# Altium PCB LED_PCB.PcbDoc (part 1 of 3)
Units mil, origin at the board's own origin, x right, y up, seen from the top; angles counter-clockwise.
Board outline 8000 x 4000 mil, 2 copper layers (Top Layer, Bottom Layer); 186 components, 303 nets, 1412 pads, 346 vias.
Unrouted connection lines stored in the file: 5.
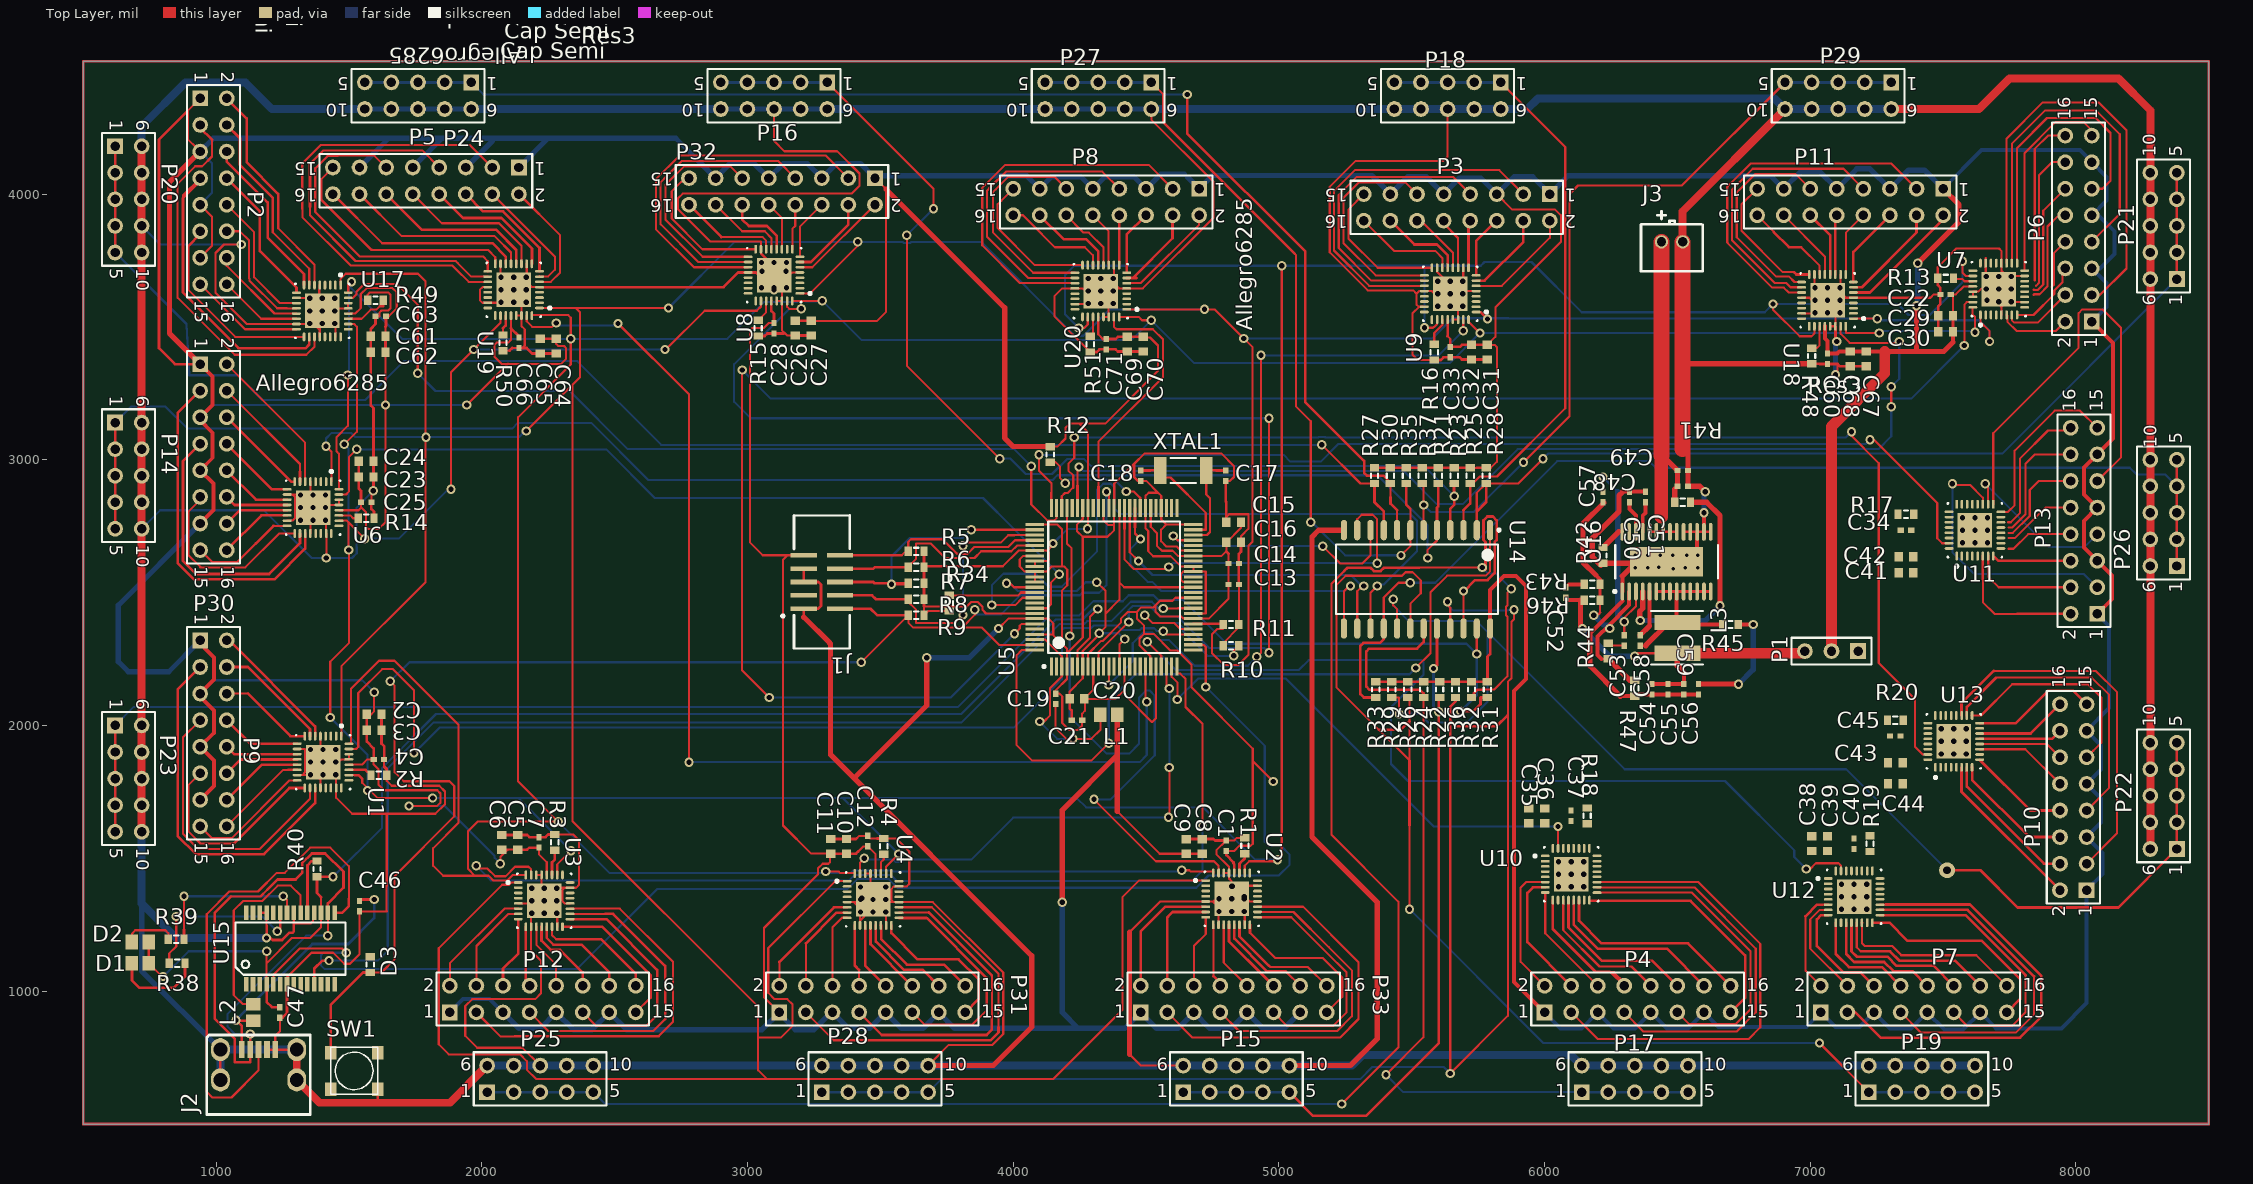
[diagram p0: Top Layer view]
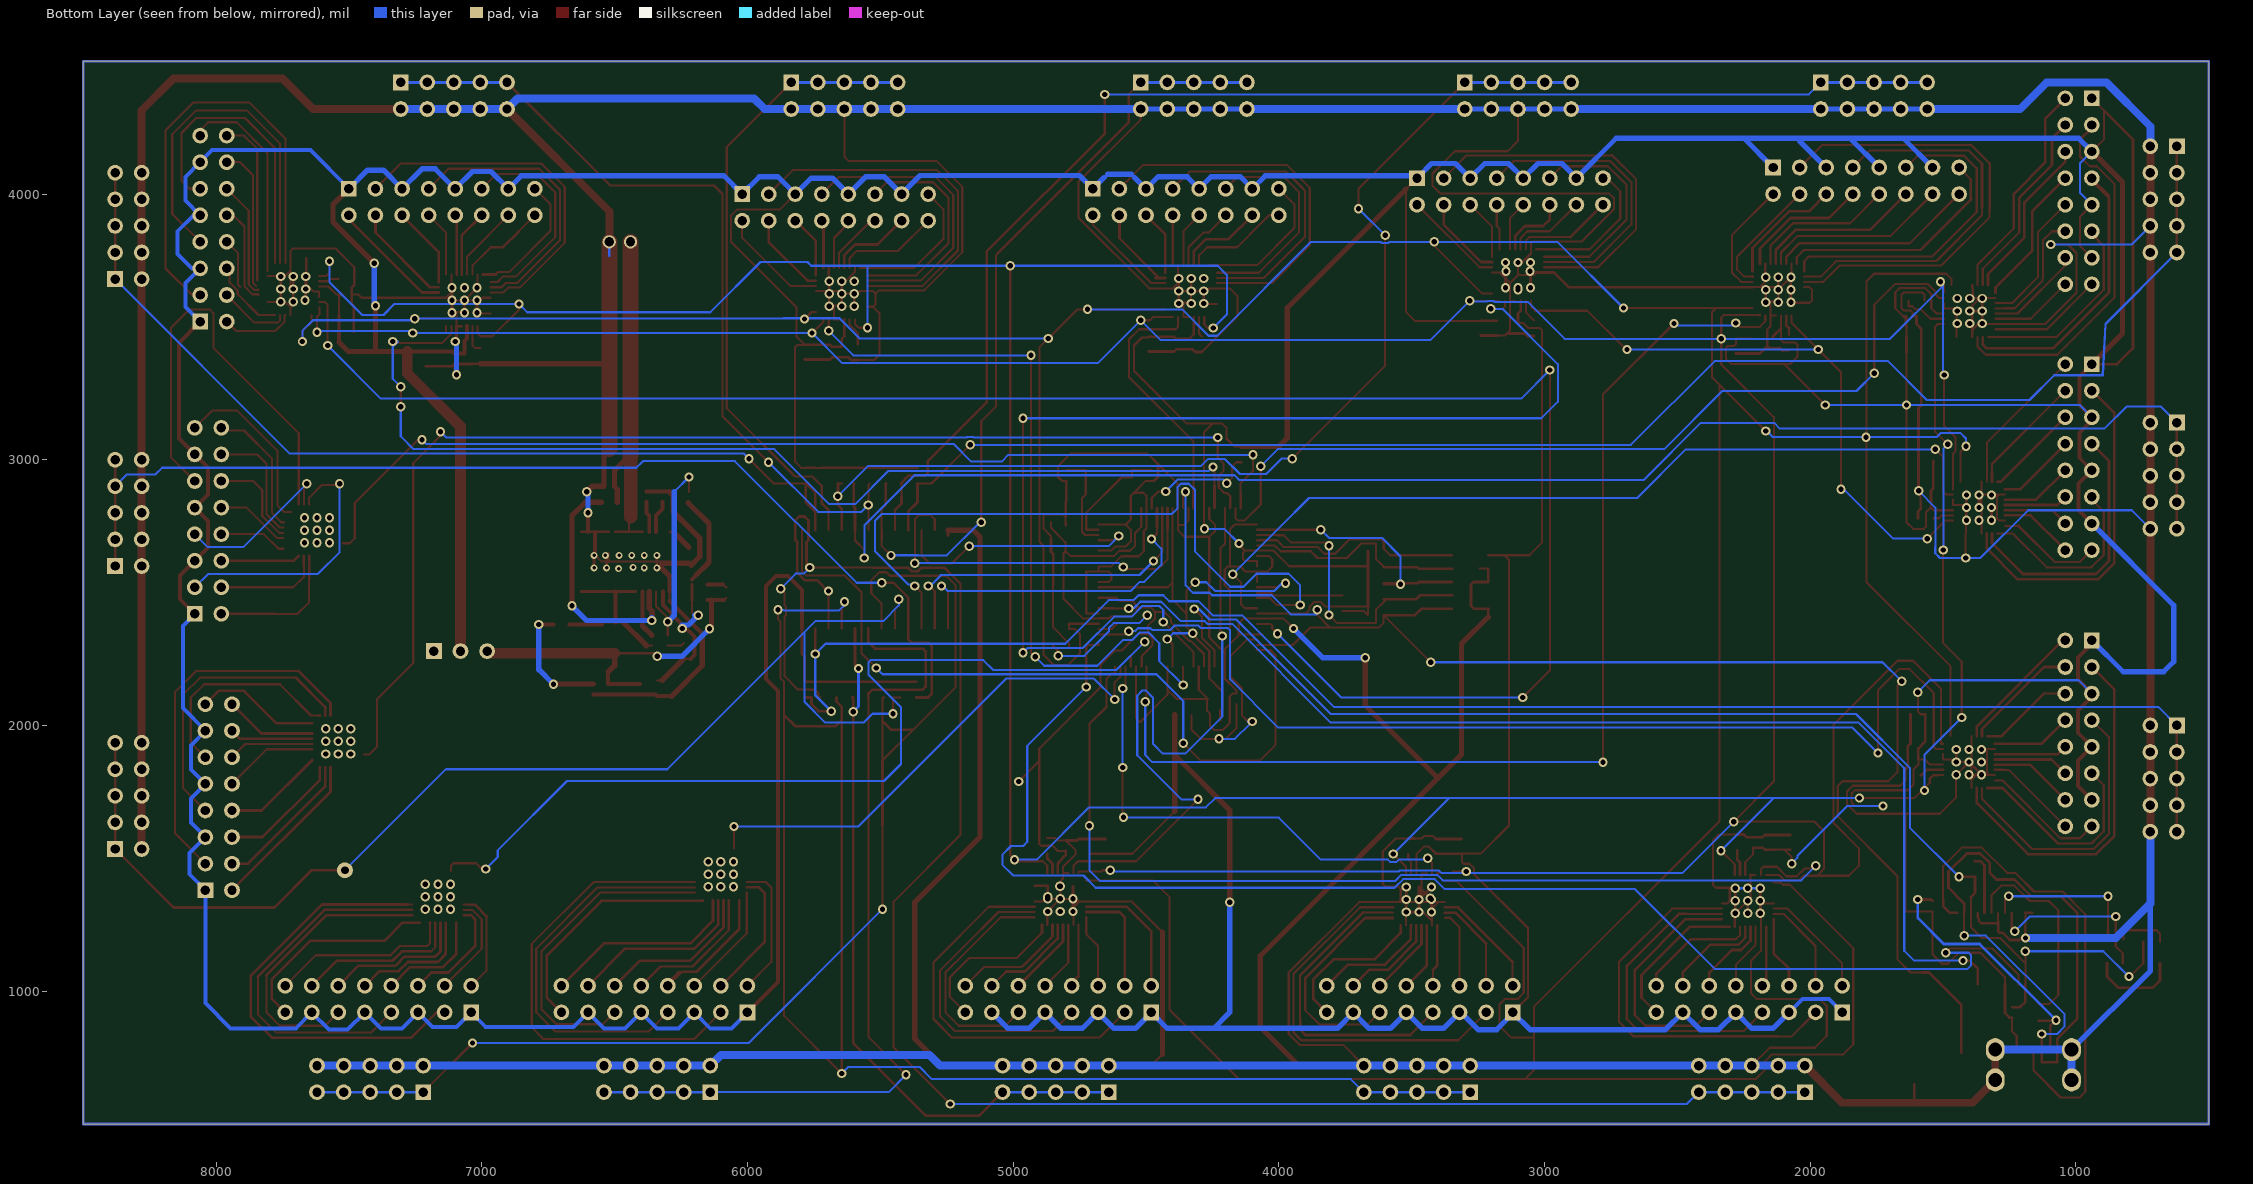
[diagram p1: Bottom Layer view, seen from below]

## Layer stack, top to bottom
Top Layer: signal copper 1.4
Dielectric: dielectric 12.6, FR-4, Dk 4.8
Bottom Layer: signal copper 1.4

## Board outline
500,500 500,4500 8500,4500 8500,500

## Design rules (kind name [scope] priority, off if disabled: settings)
Clearance [All] p1: gap=8
PolygonConnect [All] p1: connectstyle=Relief reliefconductorwidth=10 reliefentries=4 polygonreliefangle="90 Angle"
RoomDefinition NEWLED [InComponentClass('NEWLED')] p1: confinementstyle=ConfineIn formatcopy=TRUE lockcomponents=FALSE outline 8545,555 13415,555 13415,925 8545,925
RoomDefinition POWER [InComponentClass('POWER')] p2: confinementstyle=ConfineIn formatcopy=TRUE lockcomponents=FALSE outline 8710,870 13650,870 13650,1390 8710,1390
RoomDefinition USB [InComponentClass('USB')] p3: confinementstyle=ConfineIn formatcopy=TRUE lockcomponents=FALSE outline 7045,5780 9680,5780 9680,6295 7045,6295
RoomDefinition TILE_DEMUX [InComponentClass('TILE_DEMUX')] p4: confinementstyle=ConfineIn formatcopy=TRUE lockcomponents=FALSE outline 7045,4980 14775,4980 14775,5730 7045,5730
RoomDefinition REDLED [InComponentClass('REDLED')] p5: confinementstyle=ConfineIn formatcopy=TRUE lockcomponents=FALSE outline 7045,4560 11925,4560 11925,4930 7045,4930
RoomDefinition LED_HEADERS [InComponentClass('LED_HEADERS')] p6: confinementstyle=ConfineIn formatcopy=TRUE lockcomponents=FALSE outline 6405,6715 9465,6715 9465,8590 6405,8590
RoomDefinition GREENLED [InComponentClass('GREENLED')] p7: confinementstyle=ConfineIn formatcopy=TRUE lockcomponents=FALSE outline 9435,3130 14305,3130 14305,3500 9435,3500
RoomDefinition CPULED [InComponentClass('CPULED')] p8: confinementstyle=ConfineIn formatcopy=TRUE lockcomponents=FALSE outline 8990,1610 14660,1610 14660,2410 8990,2410
RoomDefinition BLUELED [InComponentClass('BLUELED')] p9: confinementstyle=ConfineIn formatcopy=TRUE lockcomponents=FALSE outline 9365,825 13425,825 13425,1195 9365,1195
RoutingVias [All] p1: holewidth=20 width=35 viastyle="Through Hole" minholewidth=20 minwidth=35 maxholewidth=20 maxwidth=35
SilkscreenOverComponentPads [All] p1: minsilkscreentomaskgap=10
SolderMaskExpansion [All] p1: expansion=4
Width "Schematic Width Constraint" [InNet('NetC46_2')] p1: maxlimit=20 minlimit=10 preferedwidth=10 minimp=50.000000 maximp=50.000000 favimp=50.000000
Width [All] p2: maxlimit=8 minlimit=8 preferedwidth=8 minimp=50.000000 maximp=50.000000 favimp=50.000000
27 further rules are at their usual default settings.

## Classes and differential pairs
component class NEWLED: C34 C35 C36 C37 C38 C39 C40 C41 C42 C43 C44 C45 R17 R18 R19 R20 U10 U11 U12 U13
component class TILE_DEMUX: P14 P15 P16 P17 P18 P19 P20 P21 P22 P23 P24 P25 P26 P27 P28 P29 P? R21 R22 R23 R24 R25 R26 R27 R28 R29 R30 R31 R32 R33 R35 R36 R37 U14
component class BLUELED: C1 C2 C3 C4 C5 C6 C7 C8 C9 C10 C11 C12 R1 R2 R3 R4 U1 U2 U3 U4
component class CPULED: C13 C14 C15 C16 C17 C18 C19 C20 C21 J1 J3 L1 R5 R6 R7 R8 R9 R10 R11 R12 R34 SW1 U5 XTAL1
component class GREENLED: C22 C23 C24 C25 C26 C27 C28 C29 C30 C31 C32 C33 R13 R14 R15 R16 U6 U7 U8 U9
component class LED_HEADERS: P2 P3 P4 P5 P6 P7 P8 P9 P10 P11 P12 P13 P30 P31 P32 P33
component class REDLED: C34 C35 C36 C37 C38 C39 C40 C41 C42 C43 C44 C45 R17 R18 R19 R20 U10 U11 U12 U13
component class USB: C46 C47 D1 D2 D3 J2 L2 R38 R39 R40 U15
component class POWER: C48 C49 C50 C51 C52 C53 C54 C55 C56 C57 C58 C59 L3 P1 R41 R42 R43 R44 R45 R46 R47 U16

## Components (designator, comment, footprint, x,y, rotation, side; value= is the part's Value field where it differs from the comment)
C1 "Cap Semi" CAPC1005L 4802.24,1547.24 r270 top
C2 "Cap Semi" CAPC1608L 1595.2,1982.24 r180 top
C3 "Cap Semi" CAPC1608L 1595.2,2042.24 r180 top
C4 "Cap Semi" CAPC1005L 1612.76,1872.24 r180 top
C5 "Cap Semi" CAPC1608L 2135,1560 r270 top
C6 "Cap Semi" CAPC1608L 2075,1560 r270 top
C7 "Cap Semi" CAPC1005L 2215,1560 r270 top
C8 "Cap Semi" CAPC1608L 4712.24,1544.8 r270 top
C9 "Cap Semi" CAPC1608L 4652.24,1544.8 r270 top
C10 "Cap Semi" CAPC1608L 3372.76,1545 r270 top
C11 "Cap Semi" CAPC1608L 3312.76,1545 r270 top
C12 "Cap Semi" CAPC1005L 3452.76,1564.68 r270 top
C13 "Cap Semi" CAPC1005L 4830,2530 r180 top
C14 "Cap Semi" CAPC1005L 4830,2610 r180 top
C15 "Cap Semi" CAPC1608L 4830,2765 r0 top
C16 "Cap Semi" CAPC1608L 4830,2690 r180 top
C17 "Cap Semi" CAPC1005L 4800,2940 r90 top
C18 "Cap Semi" CAPC1005L 4480,2940 r90 top
C19 "Cap Semi" CAPC1005L 4160,2100 r270 top
C20 "Cap Semi" CAPC1608L 4240,2100 r180 top
C21 "Cap Semi" CAPC1005L 4240,2020 r180 top
C22 "Cap Semi" CAPC1005L 7509.53,3622.44 r0 top
C23 "Cap Semi" CAPC1608L 1565,2935 r180 top
C24 "Cap Semi" CAPC1608L 1565,2995 r180 top
C25 "Cap Semi" CAPC1005L 1565,2840 r180 top
C26 "Cap Semi" CAPC1608L 3180,3495 r90 top
C27 "Cap Semi" CAPC1608L 3240,3495 r90 top
C28 "Cap Semi" CAPC1005L 3100,3495 r90 top
C29 "Cap Semi" CAPC1608L 7509.53,3542.44 r0 top
C30 "Cap Semi" CAPC1608L 7509.53,3482.44 r0 top
C31 "Cap Semi" CAPC1608L 5785,3405 r90 top
C32 "Cap Semi" CAPC1608L 5725,3405 r90 top
C33 "Cap Semi" CAPC1005L 5645,3405 r90 top
C34 "Cap Semi" CAPC1005L 7360,2735 r0 top
C35 "Cap Semi" CAPC1608L 5940,1660 r270 top
C36 "Cap Semi" CAPC1608L 6000,1660 r270 top
C37 "Cap Semi" CAPC1005L 6100,1660 r270 top
C38 "Cap Semi" CAPC1608L 7005,1555 r270 top
C39 "Cap Semi" CAPC1608L 7065,1555 r270 top
C40 "Cap Semi" CAPC1005L 7165,1555 r270 top
C41 "Cap Semi" CAPC1608L 7360,2575 r0 top
C42 "Cap Semi" CAPC1608L 7360,2635 r0 top
C43 "Cap Semi" CAPC1608L 7320,1860 r0 top
C44 "Cap Semi" CAPC1608L 7320,1780 r0 top
C45 "Cap Semi" CAPC1005L 7320,1960 r0 top
C46 "" CAPC1005L 1540,1320 r90 top
C47 "" CAPC1005L 1240,920 r90 top
C48 "Cap Semi" CAPC1005L 6520,2900 r0 top
C49 "Cap Semi" CAPC1005L 6520,2960 r0 top
C50 "Cap Semi" CAPC1005L 6320,2860 r90 top
C51 "Cap Semi" CAPC1005L 6380,2860 r90 top
C52 "Cap Semi" CAPC1005L 6080,2500 r90 top
C53 "Cap Semi" CAPC1005L 6300,2320 r270 top
C54 "Cap Semi" CAPC1005L 6404.13,2136.38 r90 top
C55 "Cap Semi" CAPC1005L 6464.13,2136.38 r90 top
C56 "Cap Semi" CAPC1005L 6524.13,2136.38 r90 top
C57 "Cap Semi" CAPC1005L 6220,2860 r270 top
C58 "Cap Semi" CAPC1005L 6360,2320 r270 top
C59 "Cap Semi" CAPC1005L 6579.13,2136.38 r90 top
C60 "Cap Semi" CAPC1005L 7065,3380 r90 top
C61 "Cap Semi" CAPC1608L 1610,3465 r0 top
C62 "Cap Semi" CAPC1608L 1610,3405 r0 top
C63 "Cap Semi" CAPC1005L 1620,3540 r0 top
C64 "Cap Semi" CAPC1608L 2280,3427.56 r90 top
C65 "Cap Semi" CAPC1608L 2220,3427.56 r90 top
C66 "Cap Semi" CAPC1005L 2140,3440 r90 top
C67 "Cap Semi" CAPC1608L 7210,3380 r90 top
C68 "Cap Semi" CAPC1608L 7150,3380 r90 top
C69 "Cap Semi" CAPC1608L 4430,3435 r90 top
C70 "Cap Semi" CAPC1608L 4490,3435 r90 top
C71 "Cap Semi" CAPC1005L 4350,3435 r90 top
D1 "TXLED" INDC2012L 715,1105 r180 top
D2 "RXLED" INDC2012L 715,1185 r180 top
D3 "Diode" SurfaceMount(603) 1580,1100 r90 top
J1 "JTAG" JTAG-10 3280,2540 r270 top
J2 "USB" "USB Minib (thru-hole)" 1160,780 r90 top
J3 "Bat" BatteryConnJST 6480,3820 r0 top
L1 "Inductor" INDC2012L 4360,2040 r0 top
L2 "Inductor" INDC2012L 1140,920 r90 top
L3 "0.65uH" IndPow 6500,2330 r270 top
P1 "Header 3" HDR1X3 7180,2280 r180 top
P2 "Header 8X2" HDR2X8 940,4360 r270 top
P3 "Header 8X2" HDR2X8 6020,4000 r180 top
P4 "Header 8X2" HDR2X8 6000,920 r0 top
P5 "Header 8X2" HDR2X8 2140,4100 r180 top
P6 "Header 8X2" HDR2X8 8060,3520 r90 top
P7 "Header 8X2" HDR2X8 7040,920 r0 top
P8 "Header 8X2" HDR2X8 4700,4020 r180 top
P9 "Header 8X2" HDR2X8 940,2320 r270 top
P10 "Header 8X2" HDR2X8 8040,1380 r90 top
P11 "Header 8X2" HDR2X8 7500,4020 r180 top
P12 "Header 8X2" HDR2X8 1880,920 r0 top
P13 "Header 8X2" HDR2X8 8080,2420 r90 top
P14 "Header 5X2A" HDR2X5_CEN 620,3140 r270 top
P15 "Header 5X2A" HDR2X5_CEN 4640,620 r0 top
P16 "Header 5X2A" HDR2X5_CEN 3300,4420 r180 top
P17 "Header 5X2A" HDR2X5_CEN 6140,620 r0 top
P18 "Header 5X2A" HDR2X5_CEN 5835,4420 r180 top
P19 "Header 5X2A" HDR2X5_CEN 7220,620 r0 top
P20 "Header 5X2A" HDR2X5_CEN 620,4180 r270 top
P21 "Header 5X2A" HDR2X5_CEN 8380,3680 r90 top
P22 "Header 5X2A" HDR2X5_CEN 8380,1535 r90 top
P23 "Header 5X2A" HDR2X5_CEN 620,2000 r270 top
P24 "Header 5X2A" HDR2X5_CEN 1960,4420 r180 top
P25 "Header 5X2A" HDR2X5_CEN 2020,620 r0 top
P26 "Header 5X2A" HDR2X5_CEN 8380,2600 r90 top
P27 "Header 5X2A" HDR2X5_CEN 4520,4420 r180 top
P28 "Header 5X2A" HDR2X5_CEN 3280,620 r0 top
P29 "Header 5X2A" HDR2X5_CEN 7305,4420 r180 top
P30 "Header 8X2" HDR2X8 940,3360 r270 top
P31 "Header 8X2" HDR2X8 3120,920 r0 top
P32 "Header 8X2" HDR2X8 3480,4060 r180 top
P33 "Header 8X2" HDR2X8 4480,920 r0 top
R1 "Res3" RESC1608L 4872.24,1547.24 r270 top
R2 "Res3" RESC1608L 1612.76,1812.24 r180 top
R3 "Res3" RESC1608L 2275,1560 r270 top
R4 "Res3" RESC1608L 3512.76,1545 r270 top
R5 "Res3" RESC1608L 3635,2655 r0 top
R6 "Res3" RESC1608L 3635,2595 r0 top
R7 "Res3" RESC1608L 3635,2535 r0 top
R8 "Res3" RESC1608L 3635,2475 r0 top
R9 "Res3" RESC1608L 3635,2415 r0 top
R10 "Res3" RESC1608L 4820,2300 r0 top
R11 "Res3" RESC1608L 4820,2380 r180 top
R12 "Res3" RESC1608L 4140,3020 r90 top
R13 "Res3" RESC1608L 7509.53,3682.44 r0 top
R14 "Res3" RESC1608L 1565,2780 r180 top
R15 "Res3" RESC1608L 3040,3495 r90 top
R16 "Res3" RESC1608L 5585,3405 r90 top
R17 "Res3" RESC1608L 7360,2795 r0 top
R18 "Res3" RESC1608L 6160,1660 r270 top
R19 "Res3" RESC1608L 7225,1555 r270 top
R20 "Res3" RESC1608L 7320,2020 r0 top
R21 "Res3" RESC1608L 5600,2940 r90 top
R22 "Res3" RESC1608L 5605,2135 r90 top
R23 "Res3" RESC1608L 5660,2940 r90 top
R24 "Res3" RESC1608L 5545,2135 r90 top
R25 "Res3" RESC1608L 5720,2940 r90 top
R26 "Res3" RESC1608L 5485,2135 r90 top
R27 "Res3" RESC1608L 5360,2940 r90 top
R28 "Res3" RESC1608L 5780,2940 r90 top
R29 "Res3" RESC1608L 5425,2135 r90 top
R30 "Res3" RESC1608L 5420,2940 r90 top
R31 "Res3" RESC1608L 5785,2135 r90 top
R32 "Res3" RESC1608L 5725,2135 r90 top
R33 "Res3" RESC1608L 5365,2135 r90 top
R34 "Res3" RESC1608L 3760,2460 r90 top
R35 "Res3" RESC1608L 5480,2940 r90 top
R36 "Res3" RESC1608L 5665,2135 r90 top
R37 "Res3" RESC1608L 5540,2940 r90 top
R38 "" RESC1608L 853.5,1105 r0 top
R39 "" RESC1608L 850,1195 r180 top
R40 "Res3" RESC1608L 1380,1460 r90 top
R41 "Res3" RESC1608L 6520,2840 r0 top
R42 "Res3" RESC1608L 6220,2640 r270 top
R43 "Res3" RESC1608L 6179.13,2531.38 r180 top
R44 "Res3" RESC1608L 6240,2280 r270 top
R45 "Res3" RESC1608L 6700,2380 r180 top
R46 "Res3" RESC1608L 6179.13,2471.38 r180 top
R47 "Res3" RESC1608L 6340,2140 r90 top
R48 "Res3" RESC1608L 7005,3390.47 r90 top
R49 "Res3" RESC1608L 1600,3600 r0 top
R50 "Res3" RESC1608L 2080,3440 r90 top
R51 "Res3" RESC1608L 4290,3435 r90 top
SW1 "Switch-TL3315" Switch-TL3315 1520,700 r0 top
U1 "Allegro6285" QFN-32 1402.76,1862.24 r270 top
U2 "Allegro6285" QFN-32 4822.24,1347.24 r0 top
U3 "Allegro6285" QFN-32 2235,1340 r0 top
U4 "Allegro6285" QFN-32 3472.76,1345 r0 top
U5 "LM3S8962" LQFP-100 4380,2520 r90 top
U6 "Allegro6285" QFN-32 1365,2820 r270 top
U7 "Allegro6285" QFN-32 7709.53,3642.44 r90 top
U8 "Allegro6285" QFN-32 3100,3695 r180 top
U9 "Allegro6285" QFN-32 5645,3625 r180 top
U10 "Allegro6285" QFN-32 6100,1440 r0 top
U11 "Allegro6285" QFN-32 7620,2735 r90 top
U12 "Allegro6285" QFN-32 7165,1355 r0 top
U13 "Allegro6285" QFN-32 7540,1940 r90 top
U14 "MUX" SOIC-24MUX 5520,2550 r270 top
U15 "FT232RL" SSOP-28 1280,1160 r0 top
U16 "Power" TSOP_28_PowerPad 6459.13,2616.38 r90 top
U17 "Allegro6285" QFN-32 1400,3560 r270 top
U18 "Allegro6285" QFN-32 7065,3600 r180 top
U19 "Allegro6285" QFN-32 2120,3640 r180 top
U20 "Allegro6285" QFN-32 4330,3635 r180 top
XTAL1 "8 MHz" RESC5025L 4640,2960 r180 top

## Footprints (in the part's own frame and the unit in brackets; to place one, negate y for a bottom-side part, rotate by r counter-clockwise, add the part's x,y. Pads: shape width x height; smd on the part's side, far side on the other; paste and mask are expansions set on the pad)
BatteryConnJST [mil] "Connector for Battery"
  round 50 hole 35: 1(-40,0) 2(40,0)
  silkscreen extent -117,-110 116,115
CAPC1005L [mm] "Chip Capacitor, Body 1.0x0.5mm, IPC High Density"
  rect 0.6x0.5 smd: 1(-0.5,0) 2(0.5,0)
  body extent -0.55,-0.3 0.55,0.3, height 1.3
CAPC1608L [mm] "Chip Capacitor, Body 1.6x0.8mm, IPC High Density"
  rect 0.8x0.9 smd: 1(-0.7,0) 2(0.7,0)
  body extent -0.87,-0.48 0.87,0.48, height 1.3
HDR1X3 [mm] "Connector; Header; 3 Position"
  rect 1.5x1.5 hole 0.9: 1(0,0)
  round 1.5 hole 0.9: 2(2.54,0) 3(5.08,0)
  silkscreen extent -1.27,-1.27 6.35,1.27
HDR2X5_CEN [mm] "Connector; Header; 5x2 Position"
  rect 1.5x1.5 hole 0.9: 1(0,0)
  round 1.5 hole 0.9: 2(2.54,0) 3(5.08,0) 4(7.62,0) 5(10.16,0) 6(0,2.54) 7(2.54,2.54) 8(5.08,2.54) 9(7.62,2.54) 10(10.16,2.54)
  silkscreen extent -1.27,-1.27 11.43,3.81
HDR2X8 [mm] "Connector; Header; 8x2 Position"
  rect 1.5x1.5 hole 0.9: 1(0,0)
  round 1.5 hole 0.9: 2(0,2.54) 3(2.54,0) 4(2.54,2.54) 5(5.08,0) 6(5.08,2.54) 7(7.62,0) 8(7.62,2.54) 9(10.16,0) 10(10.16,2.54) 11(12.7,0) 12(12.7,2.54) 13(15.24,0) 14(15.24,2.54) 15(17.78,0) 16(17.78,2.54)
  silkscreen extent -1.27,-1.27 19.05,3.81
INDC2012L [mm] "Chip Inductor, Body 2.0x1.2mm, IPC High Density"
  rect 1.2x1.4 smd: 1(-0.8,0) 2(0.8,0)
  body extent -1.1,-0.7 1.1,0.7, height 0.55
IndPow [mil]
  rect 56.5x173 smd: 1(-58.25,0) 2(58.25,0)
  silkscreen extent -100,-100 100,97
JTAG-10 [mm] "Connector, Socket Strip, Double Row, SMT, 20 Position, Vertical, Pitch 2mm, Body 20 x 4 mm (LxW)"
  rect 0.44x2.5 smd: 1(-2.56,-1.73) 2(-2.56,1.73) 3(-1.28,-1.73) 4(-1.28,1.73) 5(0,-1.73) 6(0,1.73) 7(1.28,-1.73) 8(1.28,1.73) 9(2.56,-1.73) 10(2.56,1.73)
  silkscreen extent -6.35,-3.86 6.35,2.67, body extent -6.35,-2.01 6.35,2.03, height 3.56
LQFP-100 [mm] "100-Pin LQFP Package"
  rect 1.75x0.3 smd: 1(-7.575,6) 2(-7.575,5.5) 3(-7.575,5) 4(-7.575,4.5) 5(-7.575,4) 6(-7.575,3.5) 7(-7.575,3) 8(-7.575,2.5) 9(-7.575,2) 10(-7.575,1.5) 11(-7.575,1) 12(-7.575,0.5) 13(-7.575,0) 14(-7.575,-0.5) 15(-7.575,-1) 16(-7.575,-1.5) 17(-7.575,-2) 18(-7.575,-2.5) 19(-7.575,-3) 20(-7.575,-3.5) 21(-7.575,-4) 22(-7.575,-4.5) 23(-7.575,-5) 24(-7.575,-5.5) 25(-7.575,-6) 51(7.575,-6) 52(7.575,-5.5) 53(7.575,-5) 54(7.575,-4.5) 55(7.575,-4) 56(7.575,-3.5) 57(7.575,-3) 58(7.575,-2.5) 59(7.575,-2) 60(7.575,-1.5) 61(7.575,-1) 62(7.575,-0.5) 63(7.575,0) 64(7.575,0.5) 65(7.575,1) 66(7.575,1.5) 67(7.575,2) 68(7.575,2.5) 69(7.575,3) 70(7.575,3.5) 71(7.575,4) 72(7.575,4.5) 73(7.575,5) 74(7.575,5.5) 75(7.575,6)
  rect 0.3x1.75 smd: 26(-6,-7.575) 27(-5.5,-7.575) 28(-5,-7.575) 29(-4.5,-7.575) 30(-4,-7.575) 31(-3.5,-7.575) 32(-3,-7.575) 33(-2.5,-7.575) 34(-2,-7.575) 35(-1.5,-7.575) 36(-1,-7.575) 37(-0.5,-7.575) 38(0,-7.575) 39(0.5,-7.575) 40(1,-7.575) 41(1.5,-7.575) 42(2,-7.575) 43(2.5,-7.575) 44(3,-7.575) 45(3.5,-7.575) 46(4,-7.575) 47(4.5,-7.575) 48(5,-7.575) 49(5.5,-7.575) 50(6,-7.575) 76(6,7.575) 77(5.5,7.575) 78(5,7.575) 79(4.5,7.575) 80(4,7.575) 81(3.5,7.575) 82(3,7.575) 83(2.5,7.575) 84(2,7.575) 85(1.5,7.575) 86(1,7.575) 87(0.5,7.575) 88(0,7.575) 89(-0.5,7.575) 90(-1,7.575) 91(-1.5,7.575) 92(-2,7.575) 93(-2.5,7.575) 94(-3,7.575) 95(-3.5,7.575) 96(-4,7.575) 97(-4.5,7.575) 98(-5,7.575) 99(-5.5,7.575) 100(-6,7.575)
  silkscreen extent -7.7,-6.3 6.3,6.82, body extent -7,-7 7,7, height 1.6
QFN-32 [mm] "QFN, 32-Leads, Body 5.2x5.2mm (max), Pitch 0.50mm, IPC Medium Density"
  oval 0.85x0.25 smd: 1(-2.475,1.75) 2(-2.475,1.25) 3(-2.475,0.75) 4(-2.475,0.25) 5(-2.475,-0.25) 6(-2.475,-0.75) 7(-2.475,-1.25) 8(-2.475,-1.75) 17(2.475,-1.75) 18(2.475,-1.25) 19(2.475,-0.75) 20(2.475,-0.25) 21(2.475,0.25) 22(2.475,0.75) 23(2.475,1.25) 24(2.475,1.75)
  oval 0.25x0.85 smd: 9(-1.75,-2.475) 10(-1.25,-2.475) 11(-0.75,-2.475) 12(-0.25,-2.475) 13(0.25,-2.475) 14(0.75,-2.475) 15(1.25,-2.475) 16(1.75,-2.475) 25(1.75,2.475) 26(1.25,2.475) 27(0.75,2.475) 28(0.25,2.475) 29(-0.25,2.475) 30(-0.75,2.475) 31(-1.25,2.475) 32(-1.75,2.475)
  rect 3.3x3.3 smd: 33(0,0)
  silkscreen extent -3.57,-2.6 2.6,2.6, body extent -2.57,-2.58 2.58,2.57, height 1
RESC1608L [mm] "Chip Resistor, Body 1.6x0.8mm, IPC High Density"
  rect 0.7x0.9 smd: 1(-0.75,0) 2(0.75,0)
  silkscreen extent -0.2,-0.35 0.2,0.35, body extent -0.85,-0.48 0.85,0.48, height 0.9
RESC5025L [mm] "Chip Resistor, Body 5.0x2.5mm, IPC High Density"
  rect 1.2x2.6 smd: 1(-2.2,0) 2(2.2,0)
  silkscreen extent -1.2,-1.2 1.2,1.2, body extent -2.58,-1.33 2.58,1.33, height 0.9
SOIC-24MUX [mm] "SOIC, 24-Leads, Body 15.5x7.6mm (max), Pitch 1.27mm, IPC Medium Density"
  oval 1.95x0.6 smd: 1(-4.7,6.985) 2(-4.7,5.715) 3(-4.7,4.445) 4(-4.7,3.175) 5(-4.7,1.905) 6(-4.7,0.635) 7(-4.7,-0.635) 8(-4.7,-1.905) 9(-4.7,-3.175) 10(-4.7,-4.445) 11(-4.7,-5.715) 12(-4.7,-6.985) 13(4.7,-6.985) 14(4.7,-5.715) 15(4.7,-4.445) 16(4.7,-3.175) 17(4.7,-1.905) 18(4.7,-0.635) 19(4.7,0.635) 20(4.7,1.905) 21(4.7,3.175) 22(4.7,4.445) 23(4.7,5.715) 24(4.7,6.985)
  silkscreen extent -4.82,-7.75 3.33,7.96, body extent -3.8,-7.77 3.8,7.77, height 2.65
SSOP-28 [mm]
  rect 0.44x1.37 smd: 1(-4.225,-3.415) 2(-3.575,-3.415) 3(-2.925,-3.415) 4(-2.275,-3.415) 5(-1.625,-3.415) 6(-0.975,-3.415) 7(-0.325,-3.415) 8(0.325,-3.415) 9(0.975,-3.415) 10(1.625,-3.415) 11(2.275,-3.415) 12(2.925,-3.415) 13(3.575,-3.415) 14(4.225,-3.415) 15(4.225,3.415) 16(3.575,3.415) 17(2.925,3.415) 18(2.275,3.415) 19(1.625,3.415) 20(0.975,3.415) 21(0.325,3.415) 22(-0.325,3.415) 23(-0.975,3.415) 24(-1.625,3.415) 25(-2.275,3.415) 26(-2.925,3.415) 27(-3.575,3.415) 28(-4.225,3.415)
  silkscreen extent -5.25,-2.5 5.25,2.5
SurfaceMount(603) [mm]
  rect 0.7x0.9 smd: 1(-0.75,0) 2(0.75,0)
  silkscreen extent -0.2,-0.35 0.2,0.35, body extent -0.85,-0.48 0.85,0.48, height 0.9
Switch-TL3315 [mm] "Small SMD Tact Switch E-Switch TL3315"
  rect 1.1x1.3 smd: 1(-2.25,1.75) 2(2.25,1.75) 3(-2.25,-1.75) 4(2.25,-1.75)
  silkscreen extent -2.25,-2.25 2.25,2.25
TSOP_28_PowerPad [mm] "TSOP, 28-Leads, Body 9.8x4.5mm (max), Pitch 0.65mm, IPC Medium Density"
  oval 1.7x0.35 smd: 1(-2.85,4.225) 2(-2.85,3.575) 3(-2.85,2.925) 4(-2.85,2.275) 5(-2.85,1.625) 6(-2.85,0.975) 7(-2.85,0.325) 8(-2.85,-0.325) 9(-2.85,-0.975) 10(-2.85,-1.625) 11(-2.85,-2.275) 12(-2.85,-2.925) 13(-2.85,-3.575) 14(-2.85,-4.225) 15(2.85,-4.225) 16(2.85,-3.575) 17(2.85,-2.925) 18(2.85,-2.275) 19(2.85,-1.625) 20(2.85,-0.975) 21(2.85,-0.325) 22(2.85,0.325) 23(2.85,0.975) 24(2.85,1.625) 25(2.85,2.275) 26(2.85,2.925) 27(2.85,3.575) 28(2.85,4.225)
  rect 2.8x7 smd: 29(0,0)
  silkscreen extent -2.97,-4.9 1.6,5.07, body extent -2.25,-4.9 2.25,4.9, height 1.2
"USB Minib (thru-hole)" [mm]
  rect 1.65x0.55 smd: 1(0,1.6) 2(0,0.8) 3(0,0) 4(0,-0.8) 5(0,-1.6)
  oval 2.2x1.8 hole 1.321: 6(0,3.65) 7(-2.9,3.65) 8(-2.9,-3.65) 9(0,-3.65)
  silkscreen extent -6.2,-4.95 1.39,4.95

## Part data
C1 C2 C3 C4 C5 C6 C7 C8 C9 C10 C11 C12 C13 C14 C15 C16 C17 C18 C19 C20 C21 C22 C23 C24 C25 C26 C27 C28 C29 C30 C31 C32 C33 C34 C35 C36 C37 C38 C39 C40 C41 C42 C43 C44 C45 C48 C49 C50 C51 C52 C53 C54 C55 C56 C57 C58 C59 C60 C61 C62 C63 C64 C65 C66 C67 C68 C69 C70 C71: "Capacitor (Semiconductor SIM Model)"
C46 C47: library part Cap, "Capacitor"
D1 D2: library part LED2, "Typical RED, GREEN, YELLOW, AMBER GaAs LED"
D3: library part SchottkeyDiode
J1: library part "Header 5X2H", "Header, 5-Pin, Dual row, Right Angle"
J2: library part USB-ConnTH
J3: library part BatteryConnJST
L3: library part Inductor
P1: "Header, 3-Pin"
P2 P3 P4 P5 P6 P7 P8 P9 P10 P11 P12 P13 P30 P31 P32 P33: "Header, 8-Pin, Dual row"
P14 P15 P16 P17 P18 P19 P20 P21 P22 P23 P24 P25 P26 P27 P28 P29: "Header, 5-Pin, Dual row"
R1 R2 R3 R4 R5 R6 R7 R8 R9 R10 R11 R12 R13 R14 R15 R16 R17 R18 R19 R20 R21 R22 R23 R24 R25 R26 R27 R28 R29 R30 R31 R32 R33 R34 R35 R36 R37 R40 R41 R42 R43 R44 R45 R46 R47 R48 R49 R50 R51: "Resistor"
R38 R39: library part Res1, "Resistor"
U16: library part Power_Switcher
XTAL1: library part XTAL, "Crystal Oscillator"

## Free pads (board coordinates)
  round 60 hole 30: 0(7515,1455)

## Via types
v1: diameter 35, hole 20, Top Layer to Bottom Layer, 334 vias
v2: diameter 25.98, hole 12.99, Top Layer to Bottom Layer, tented top, 12 vias

## Nets (pads, with @x,y where several pads share a name; then routed paths per layer and width w, separated by ;. In a path a pad name is that pad's centre, name@x,y a point inside that pad or via, vN(x,y) a via of type N, cw(c..) or ccw(c..) an arc to the next point about the centre after c; other vN are vias at no path point)
FTDI_RX: U5.26
FTDI_TX: U5.27 U15.5 | length 5364.6
  Top Layer w8: U15.5@1216.02,1025.55 1216.02,1062.02 1314.5,1160.5 1474.23,1160.5 v1(1490.23,1144.5) ; U5.27@4678.23,2303.46 4716.54,2303.46 4725,2295 v1(4725,2145)
  Top Layer w10: U5.27@4678.23,2303.46 U5.27@4679.76,2305
  Bottom Layer w8: v1(1490.23,1144.5) 1404,1144.5 1395.5,1136 1395.5,1096 1407.68,1083.82 2359.82,1083.82 2659.77,1383.77 3375.32,1383.77 3413.29,1421.74 3532.22,1421.74 3565,1388.96 ; 3565,1389 4689,1389 4735,1435 4999.35,1435 5040.5,1476.15 5040.5,1513.85 5007.88,1546.47 4962.5,1546.47 4947,1561.97 4947,1923 v1(4725,2145)
GND: C1.1 C2.1 C3.1 C4.1 C5.1 C6.1 C7.1 C8.1 C9.1 C10.1 C11.1 C12.1 C13.1 C14.1 C15.1 C16.1 C17.1 C18.1 C19.1 C20.1 C21.1 C22.1 C23.1 C24.1 C25.1 C26.1 C27.1 C28.1 C29.1 C30.1 C31.1 C32.1 C33.1 C46.1 C47.1 C48.2 C49.2 C50.2 C51.2 C54.1 C55.1 C56.1 C59.1 C60.1 C61.1 C62.1 C63.1 C64.1 C65.1 C66.1 C67.1 C68.1 C69.1 C70.1 C71.1 J1.3 J1.5 J1.9 J2.4 J2.5 J2.6 J2.7 J2.8 J2.9 J3.2 P14.6 P14.7 P14.8 P14.9 P14.10 P15.6 P15.7 P15.8 P15.9 P15.10 P16.6 P16.7 P16.8 P16.9 P16.10 P17.6 P17.7 P17.8 P17.9 P17.10 P18.6 P18.7 P18.8 P18.9 P18.10 P19.6 P19.7 P19.8 P19.9 P19.10 P20.6 P20.7 P20.8 P20.9 P20.10 P21.6 P21.7 P21.8 P21.9 P21.10 P22.6 P22.7 P22.8 P22.9 P22.10 P23.6 P23.7 P23.8 P23.9 P23.10 P24.6 P24.7 P24.8 P24.9 P24.10 P25.6 P25.7 P25.8 P25.9 P25.10 P26.6 P26.7 P26.8 P26.9 P26.10 P27.6 P27.7 P27.8 P27.9 P27.10 P28.6 P28.7 P28.8 P28.9 P28.10 P29.6 P29.7 P29.8 P29.9 P29.10 R1.1 R2.1 R3.1 R4.1 R10.1 R11.1 R13.1 R14.1 R15.1 R16.1 R42.2 R47.1 R48.1 R49.1 R50.1 R51.1 SW1.4 U1.5 U1.10 U1.15 U1.20 U1.23 U1.29 U1.30 U1.33 U2.5 U2.10 U2.15 U2.20 U2.23 U2.29 U2.30 U2.33 U3.5 U3.10 U3.15 U3.20 U3.23 U3.29 U3.30 U3.33 U4.5 U4.10 U4.15 U4.20 U4.23 U4.29 U4.30 U4.33 U5.4 U5.9 U5.15 U5.21 U5.33 U5.39 U5.41 U5.42 U5.45 U5.50 U5.54 U5.57 U5.63 U5.65 U5.69 U5.76 U5.82 U5.85 U5.86 U5.87 U5.94 U5.97 U6.5 U6.10 U6.15 U6.20 U6.23 U6.29 U6.30 U6.33 U7.5 U7.10 U7.15 U7.20 U7.23 U7.29 U7.30 U7.33 U8.5 U8.10 U8.15 U8.20 U8.23 U8.29 U8.30 U8.33 U9.5 U9.10 U9.15 U9.20 U9.23 U9.29 U9.30 U9.33 U14.12 U15.7 U15.18 U15.21 U15.25 U15.26 U16.1 U16.15 U16.16 U16.17 U16.18 U16.19 U16.29 U17.5 U17.10 U17.15 U17.20 U17.23 U17.29 U17.30 U17.33 U18.5 U18.10 U18.15 U18.20 U18.23 U18.29 U18.30 U18.33 U19.5 U19.10 U19.15 U19.20 U19.23 U19.29 U19.30 U19.33 U20.5 U20.10 U20.15 U20.20 U20.23 U20.29 U20.30 U20.33 | length 66854
  Top Layer w8: v1(1095,3810) 1030,3810 998,3778 998,3628 1115.21,3510.79 U17.15@1302.56,3510.79 1367.37,3510.79 1390.16,3488 ; 1190.43,1245.57 U15.25@1190.43,1294.45 ; J2.5@1222.99,780 1222.99,831 1240,848.01 C47.1@1240,900.32 ; U15.7@1267.2,1025.55 1267.2,1052.56 1359.14,1144.5 1440.5,1144.5 1482,1103 1504,1103 1540,1139 C46.1@1540,1300.32 1642,1300.32 1642.28,1484.78 ; U6.15@1267.56,2770.79 1288,2770.79 1297,2779.79 1297,2860.21 1288,2869.21 ; U6.10@1267.56,2869.21 1288,2869.21 ; 1276.62,1220 1288,1220 ; 1292.8,1255.48 1357.61,1255.48 1364.64,1262.51 1364.64,1271.64 1369.57,1276.57 U15.18@1369.57,1294.45 ; 1292.8,1263.2 U15.21@1292.8,1294.45 ; U17.10@1302.56,3609.21 U17.33@1360.95,3609.21 ; U1.15@1305.32,1813.03 1324.03,1813.03 ; U1.10@1305.32,1911.46 1335,1911.46 1335,1824 1324.03,1813.03 ; U6.20@1355.16,2722.56 1355.16,2810.16 v1(1365,2820) 1355.16,2829.84 U6.33@1355.16,2873 ; U6.5@1355.16,2917.44 U6.33@1355.16,2873 ; U17.20@1390.16,3462.56 1390.16,3488 ; U17.5@1390.16,3657.44 1386.37,3609.21 U17.33@1360.95,3609.21 ; U1.20@1392.91,1764.8 1392.91,1796.12 ; U1.5@1392.91,1959.68 1392.91,1872.09 v1(1402.76,1862.24) ; v1(1400,3560) U17.33@1390.16,3550.16 ; v1(1415,2630) 1415,2721.77 U6.23@1414.21,2722.56 1414.21,2818.05 1426,2829.84 U6.29@1462.44,2829.84 U6.30@1462.44,2849.53 ; U17.23@1449.21,3462.56 1449.21,3558.05 1461,3569.84 U17.29@1497,3569.84 ; U17.29@1497.44,3569.84 U17.29@1497,3569.84 ; U17.30@1497.44,3589.53 1497,3589.53 U17.29@1497,3569.84 ; U1.30@1500.2,1891.77 U1.29@1500.2,1872.09 1471,1872.09 1461.16,1862.24 v1(1450,1862.24) v1(1402.76,1862.24) ; R49.1@1570.47,3600 1570.47,3621.28 1579.2,3630 1648,3630 1656.37,3621.63 1656.37,3570.22 1648,3561.84 1645.53,3561.84 1622.9,3561.84 1615.88,3554.81 1615.88,3549 ; C25.1@1584.68,2840 1584.68,2875.68 v1(1592,2883) ; C63.1@1600.32,3540 1615.87,3540 1615.87,3549 ; 1608.58,580 SW1.4@1608.58,650 ; C4.1@1632.44,1872.24 1632.44,1846.84 1632.44,1841.84 1642.28,1832 R2.1@1642.28,1812.24 1642.28,1792 1661.15,1773.14 1840,1773.14 1861.5,1751.64 1861.5,1704 1825,1667.5 1642.28,1667.5 1512.47,1667.5 1451.97,1728 U1.23@1451.97,1764.8 1451.97,1813.03 v1(1402.76,1862.24) ; U19.20@2022.56,3649.84 2002.84,3649.84 1993,3640 1993,3600 2002.21,3590.79 U19.23@2022.56,3590.79 2070.79,3590.79 v1(2072.76,3592.76) ; U19.15@2070.79,3737.44 2070.79,3691.05 2112,3649.84 2120,3649.84 U19.33@2129.84,3649.84 ; R50.1@2080,3410.47 2104,3410.47 2113.84,3420.32 2114.84,3420.32 C66.1@2140,3420.32 2152,3420.32 2162,3430.32 2162,3490.53 2149.53,3503 U19.30@2149.53,3542.56 ; U19.29@2129.84,3542.56 U19.30@2149.53,3542.56 ; U3.5@2137.56,1330.16 2177.91,1330.16 2178,1330.16 2185.79,1322.37 U3.10@2185.79,1242.56 2185.79,1152.21 2223,1115 2223,992 2201,970 1964,970 1938,944 1938,832 1983,787 2153,787 P25.8@2220,720 ; U19.10@2169.21,3737.44 2169.21,3670 2189.37,3649.84 ; U3.30@2205.47,1437.44 U3.29@2225.16,1437.44 2225.16,1349.84 v1(2235,1340) v1(2282.24,1292.76) 2284.21,1290.79 U3.15@2284.21,1242.56 ; U19.5@2217.44,3649.84 2189.37,3649.84 ; R3.1@2275,1589.53 2344.47,1589.53 2366,1568 2366,1400 2355.21,1389.21 U3.23@2332.44,1389.21 2312,1389.21 2303,1380.21 2303,1339.16 2312,1330.16 U3.20@2332.44,1330.16 ; 3031,3704.84 3040.84,3695 U8.33@3052.76,3695 ; v1(3055,3710) 3055,3697.24 U8.33@3052.76,3695 ; P16.8@3100,4320 3100,4200 3139,4161 3337.73,4161 3421.53,4077.2 3421.53,4031.53 3391.53,4001.53 2756,4001.53 2738.47,3984 2738.47,3942.8 2860.1,3821.17 3050.79,3821.17 U8.15@3050.79,3792.44 3050.79,3776.38 3100,3727.17 U8.33@3100,3695 ; U8.29@3109.84,3597.56 U8.30@3129.53,3597.56 ; 3136,3475.32 3142.21,3475.32 ; C26.1@3180,3467.44 3150.09,3467.44 3142.21,3475.32 ; U8.5@3197.44,3704.84 3168.9,3704.84 3147.24,3683.19 U8.33@3129.53,3665.47 ; J1.3@3211.89,2590.39 J1.3@3244.39,2590.39 ; 3310,2309.67 3312.76,2306.92 ; U4.5@3375.32,1335.16 3400.39,1335.16 ; 3408.76,1572.56 3420.57,1584.37 C12.1@3452.76,1584.37 3462.6,1574.53 3487.6,1574.53 ; U4.10@3423.54,1247.56 3423.54,1264.54 ; U4.30@3443.23,1442.44 U4.29@3462.91,1442.44 3462.91,1354.84 v1(3472.76,1345) ; R4.1@3512.76,1574.53 3560.47,1574.53 3609.15,1525.85 3609.15,1403.36 3600,1394.21 U4.23@3570.2,1394.21 3551.21,1394.21 3541,1384 3541,1344 3549.84,1335.16 ; U4.15@3521.97,1247.56 3521.97,1280 3504.97,1297 3456,1297 3423.54,1264.54 ; v1@3675,2252.24 v1(3675,2255) ; P28.10@3680,720 3758,798 3922.04,798 3962.66,838.62 3962.66,1069.97 3697.47,1335.16 U4.20@3570.2,1335.16 3549.84,1335.16 ; v1(3945,2365) 3981.89,2401.89 U5.94@4081.77,2401.89 4133.11,2401.89 4151,2384 4151,2340 ; U5.97@4061.11,2342.38 4061.11,2342.83 U5.97@4081.77,2342.83 4148.17,2342.83 4151,2340 ; U5.87@4081.77,2539.69 U5.86@4081.77,2559.37 U5.85@4081.77,2579.06 ; U5.82@4081.77,2638.11 4038.11,2638.11 4025,2625 4025,2598.19 4044.13,2579.06 U5.85@4081.77,2579.06 ; U5.76@4081.77,2756.22 4111.55,2756.22 4111.55,2755.78 4167.06,2755.78 4183.5,2739.33 4183.5,2600.81 ; U20.23@4232.56,3585.79 4280.79,3585.79 v1(4282.76,3587.76) ; U5.69@4261.89,2818.23 4261.89,2776.89 4240,2755 4240,2731.89 4261.89,2710 ; C20.1@4270,2100 4270,2055 4259.68,2044.68 C21.1@4259.68,2020 4259.68,2000 4242.68,1983 4211,1983 4184.69,2009.31 4184.69,2109.31 4174.32,2119.68 C19.1@4160,2119.68 4160,2132.17 4202.83,2175 U5.4@4202.83,2221.77 4202.83,2272 ; R51.1@4290,3405.47 4155,3540.47 4155,3615 4184.84,3644.84 U20.20@4232.56,3644.84 4261,3644.84 4270.84,3635 v1(4282.76,3635) v1(4330,3635) ; U5.9@4301.26,2221.77 4301.26,2133.7 C20.1@4267.56,2100 4385,2100 4419.37,2134.37 ; U20.29@4339.84,3537.56 U20.30@4359.53,3537.56 4359.53,3591 4330,3591 v1(4330,3635) ; U5.65@4340.63,2818.23 4340.63,2771 4356.63,2755 4380,2755 ; U20.10@4379.21,3732.44 4379.21,3665 4399.37,3644.84 ; U5.15@4419.37,2221.77 4419.37,2134.37 ; 4438,762 4480,720 P15.6@4640,720 ; 4438,1221.4 4554,1337.4 U2.5@4724.8,1337.4 4752,1337.4 ; 4470,2920.32 C18.1@4480,2920.32 4500.85,2920.32 4545.17,2876 ; P27.6@4520,4320 4520,4280 4754,4046 4754,3911 4487.84,3644.84 U20.5@4427.44,3644.84 4399.37,3644.84 ; U5.21@4537.48,2221.77 4537.48,2027.48 4522.5,2012.5 4419.37,2115.63 4419.37,2134.37 ; U5.33@4678.23,2421.57 4725,2421.57 4725,2579.06 U5.41@4678.23,2579.06 ; U5.39@4678.23,2539.69 4640,2539.69 4631,2548.69 4631,2570.06 4640,2579.06 U5.41@4678.23,2579.06 ; U5.45@4678.23,2657.8 4631.41,2657.8 4615.71,2673.5 4576,2673.5 4556.8,2692.7 4556.8,2737.02 4576,2756.22 ; U5.50@4678.23,2756.22 4576,2756.22 ; U2.10@4773.03,1249.8 4773.03,1316.37 4752,1337.4 ; R10.1@4790.47,2300 4790.47,2310 4849.53,2369.06 R11.1@4849.53,2380 4849.53,2454 4849.68,2454.16 C13.1@4849.68,2530 ; 4792,1566.93 C1.1@4802.24,1566.93 4832.24,1566.93 4842.09,1576.77 R1.1@4872.24,1576.77 ; U2.30@4792.72,1444.68 U2.29@4812.4,1444.68 ; C17.1@4800,2920.32 4816,2920.32 4831,2935.32 4831,2976 4783,3024 4495,3024 4455,2984 4380.5,2909.5 4380.5,2831.68 4380,2831.68 U5.63@4380,2818.23 4380,2755 ; C1.1@4801.93,1566.93 4765,1530 4765,1515 4812.4,1467.6 U2.29@4812.4,1444.68 ; C15.1@4802.44,2765 4802.44,2784 4813.16,2794.72 4885.31,2794.72 4885.31,2740.31 4857.56,2712.56 C16.1@4857.56,2690 ; U2.33@4869.49,1396.46 U2.23@4919.69,1396.46 ; U2.15@4871.46,1249.8 4871.46,1298.03 v1(4822.24,1347.24) ; U2.20@4919.69,1337.4 4891,1337.4 4881.16,1347.24 v1(4869.49,1347.24) v1(4822.24,1347.24) ; U9.23@5547.56,3575.79 5528,3575.79 ; R16.1@5585,3375.47 5523,3375.47 5502.5,3395.97 5502.5,3550.29 5528,3575.79 ; U9.15@5595.79,3722.44 5595.79,3706.38 5645,3657.17 v1(5645,3625) ; P18.8@5635,4320 5635,4140 5620,4125 5290,4125 5190,4025 5191.47,4023.53 5191.47,3780.84 5334.71,3637.61 5505.24,3637.61 5518,3624.84 ; U9.29@5654.84,3527.56 U9.30@5674.53,3527.56 5674.53,3581 5645,3581 v1(5645,3625) ; v1(5692.24,3672.24) 5694.21,3674.21 U9.10@5694.21,3722.44 ; U9.5@5742.44,3634.84 5692.24,3634.84 5654.84,3634.84 v1(5645,3625) ; R42.2@6212.26,2602.74 R42.2@6219.53,2610 ; 6292.8,2467.8 U16.1@6292.8,2504.17 U16.1@6292.8,2505 ; 6317.4,2616.38 6341.02,2616.38 U16.29@6459.13,2616.38 6547.72,2616.38 U16.29@6574.29,2642.95 ; U16.29@6322.76,2592.76 v2(6341.02,2592.76) ; R47.1@6340,2110.47 R47.1@6346.22,2116.69 ; 6520,3365 6524.06,3360.94 ; J3.2@6520,3820 J3.2@6532,3808 ; U16.29@6523.11,2616.38 U16.29@6523.11,2646.89 ; v1@6599.88,2799.88 v1(6600,2800) ; U18.23@6967.56,3550.79 7015.79,3550.79 v1(7017.76,3552.76) ; U18.20@6967.56,3609.84 6996,3609.84 7005.84,3600 v1(7017.76,3600) v1(7065,3600) ; U18.15@7015.79,3697.44 7015.79,3649.21 v1(7065,3600) ; U18.29@7074.84,3502.56 U18.30@7094.53,3502.56 7094.53,3556 7065,3556 v1(7065,3600) ; v1(7095,3320) 7103,3328 7103,3360.32 ; U18.10@7114.21,3697.44 7114.21,3630 7134.37,3609.84 ; R13.1@7480,3682.44 7480,3725 7550,3795 7710.37,3795 7719.37,3786 U7.20@7719.37,3739.88 7719.37,3712 ; C22.1@7490.59,3622.44 C22.1@7489.84,3622.44 7465,3622.44 7452.4,3609.84 U18.5@7162.44,3609.84 7134.37,3609.84 ; U7.30@7612.09,3612.91 U7.29@7612.09,3632.6 7632,3632.6 7660.32,3660.91 U7.23@7660.32,3739.88 7660.32,3760 ; U7.5@7719.37,3545 7719.37,3574 ; U7.10@7806.97,3593.23 7738.6,3593.23 7719.37,3574 ; U7.15@7806.97,3691.65 7739.72,3691.65 7719.37,3712 ; P22.10@8280,1935 P22.10@8280,1960 ; 1288,2869.21 1351.37,2869.21 U6.33@1355.16,2873 ; 1324.03,1813.03 1376,1813.03 1392.91,1796.12 ; U17.33@1360.95,3609.21 1390.16,3580 1390.16,3560 U17.33@1390.16,3550.16 ; 1390.16,3488 U17.33@1390.16,3550.16 ; 1392.91,1796.12 1392.91,1815 1392.91,1852.4 v1(1402.76,1862.24) ; U19.33@2129.84,3649.84 2189.37,3649.84 ; U19.33@2129.84,3649.84 v1(2120,3640) 2120,3596 2149.53,3596 U19.30@2149.53,3542.56 ; U8.33@3052.76,3695 U8.33@3100,3695 ; U8.33@3100,3695 U8.33@3129.53,3665.47 ; U8.30@3129.53,3597.56 3129.53,3488 3142.21,3475.32 ; U8.30@3129.53,3597.56 U8.33@3129.53,3665.47 ; 3400.39,1335.16 3425.51,1335.16 3462.91,1335.16 v1(3472.76,1345) ; 3400.39,1335.16 3423.54,1312 3423.54,1264.54 ; v1(3472.76,1345) 3482.6,1335.16 3520,1335.16 3549.84,1335.16 ; U5.85@4081.77,2579.06 4125.47,2579.06 4144.5,2598.09 4192,2598.09 4203.5,2586.59 4203.5,2527.09 4183.5,2507.09 4183.5,2307.5 ; 4151,2340 4183.5,2307.5 ; 4183.5,2307.5 4202.83,2288.17 4202.83,2272 ; 4202.83,2272 4261.89,2331.06 4261.89,2710 ; 4261.89,2710 4355,2710 4380,2735 4380,2755 ; v1(4330,3635) 4365,3635 4365,3644.84 4377.24,3644.84 4399.37,3644.84 ; 4545.17,2876 4510.11,2876 4498.11,2864 U5.57@4498.11,2818.23 4498.11,2742.39 4508.5,2732 4508.5,2656 4527.5,2637 4592.74,2637 4631,2598.74 U5.42@4678.23,2598.74 U5.41@4678.23,2579.06 ; 4545.17,2876 4557.17,2864 U5.54@4557.17,2818.23 4557.17,2775.05 4576,2756.22 ; 4752,1337.4 4754,1337.4 4763.84,1347.24 v1(4775,1347.24) v1(4822.24,1347.24) ; U2.29@4812.4,1444.68 4812.4,1423.84 4822.24,1414 v1(4822.24,1394.49) v1(4822.24,1347.24) ; 5518,3624.84 5528,3634.84 U9.20@5547.56,3634.84 5576,3634.84 5585.84,3625 v1(5597.76,3625) v1(5645,3625) ; 5518,3624.84 5518,3584 5526.21,3575.79 5528,3575.79 ; v1(7065,3600) 7100,3600 7100,3609.84 7112.24,3609.84 7134.37,3609.84 ; 7719.37,3574 7709.53,3583.84 v1(7709.53,3595.2) v1(7709.53,3642.44) 7719.37,3652.28 7719.37,3712
  Top Layer w10: J2.7@1016.3,665.83 J2.6@1016.3,780 ; U15.26@1164.84,1294.45 U15.25@1190.43,1294.45 ; 1190.43,1245.57 1190.43,1214.57 1212.52,1192.48 1249.09,1192.48 1276.62,1220 ; J2.4@1191.5,780 J2.5@1222.99,780 J2.9@1303.7,780 ; C47.1@1240,900.32 1250,900.32 1267.2,917.52 U15.7@1267.2,1025.55 ; 1288,1220 1292.8,1224.8 1292.8,1255.48 1292.8,1263.2 ; v1(1317.76,2772.76) v1(1317.76,2820) ; v1(1352.76,3512.76) v1(1352.76,3560) ; v1(1352.76,3607.24) v1(1352.76,3560) ; v1(1365,2820) v1(1365,2867.24) ; U1.33@1392.91,1852.4 v1(1355.51,1815) 1392.91,1815 v1(1402.76,1815) ; v1(1400,3560) 1390.16,3560 v1(1352.76,3560) ; v1(1412.24,2772.76) v1(1412.24,2820) v1(1412.24,2867.24) ; v1(1450,1862.24) v1(1450,1909.49) ; P24.10@1560,4320 P24.10@1570,4310 ; C25.1@1584.68,2840 1584.68,2814.84 1594.53,2805 R14.1@1594.53,2780 ; v1@1584.68,2875.68 1584.68,2883 1592.56,2890.87 C23.1@1592.56,2935 C24.1@1592.56,2995 1592.56,3194 1582.44,3204.12 C62.1@1582.44,3405 C61.1@1582.44,3465 1582.44,3493 1600.32,3510.87 C63.1@1600.32,3540 ; C3.1@1622.76,2042.24 C2.1@1622.76,1982.24 1622.76,1931.68 1632.44,1922 C4.1@1632.44,1872.24 ; 1632.44,1846.84 1642.28,1837 1642.28,1832 ; 1642,1300.32 1642.28,1300.6 ; 1642.28,1484.78 1642.28,1667.5 ; v1(2072.76,3592.76) v1(2072.76,3640) v1(2072.76,3687.24) ; C6.1@2075,1587.56 C5.1@2135,1587.56 2171,1587.56 2178.87,1579.68 C7.1@2215,1579.68 2240,1579.68 2249.84,1589.53 R3.1@2275,1589.53 ; 2104,3410.47 2105,3410.47 2114.84,3420.32 ; v1(2120,3640) 2120,3649.84 v1(2120,3687.24) ; 2152,3420.32 2169,3420.32 2189.32,3400 C65.1@2220,3400 C64.1@2280,3400 ; v1(2167.24,3592.76) v1(2167.24,3640) ; U3.33@2177.91,1330.16 v1(2187.76,1340) ; v1(2187.76,1292.76) v1(2187.76,1340) ; v1(2187.76,1387.24) v1(2187.76,1340) ; U19.5@2217.44,3649.84 2909.84,3649.84 2964.84,3704.84 U8.20@3002.56,3704.84 3031,3704.84 ; U3.29@2225,1437.6 U3.29@2225.16,1437.44 ; v1(2235,1292.76) v1(2235,1340) ; v1(2282.24,1292.76) v1(2282.24,1340) v1(2282.24,1387.24) 2284.21,1389.21 2312,1389.21 ; R15.1@3040,3465.47 3065,3465.47 3074.84,3475.32 C28.1@3100,3475.32 3136,3475.32 ; v1(3052.76,3647.76) U8.33@3052.76,3695 ; v1(3145,3710) 3145,3697.24 U8.33@3147.24,3695 ; v1(3147.24,3647.76) 3147.24,3683.19 U8.33@3147.24,3695 ; v1(3147.24,3742.24) U8.33@3147.24,3695 ; C26.1@3180,3467.44 C27.1@3240,3467.44 ; J1.9@3211,2439.21 J1.9@3211.89,2439.21 ; 3211.89,2407.78 J1.9@3211.89,2439.21 ; J1.3@3211.89,2590.39 J1.5@3211.89,2540 3267,2540 3277,2530 3277,2450 3266.21,2439.21 J1.9@3211.89,2439.21 ; C11.1@3312.76,1572.56 C10.1@3372.76,1572.56 3408.76,1572.56 ; v1(3425.51,1297.76) 3425.51,1335.16 v1(3425.51,1345) ; v1(3425.51,1392.24) U4.33@3462.91,1354.84 ; v1(3430,1350) 3430.51,1350 3472.76,1392.24 v1(3472.76,1345) v1(3472.76,1297.76) ; 3487.6,1574.53 R4.1@3512.76,1574.53 ; v1(3520,1297.76) 3520,1335.16 v1(3520,1345) v1(3520,1392.24) ; v1(4282.76,3587.76) v1(4282.76,3635) ; R51.1@4290,3405.47 4315,3405.47 4324.84,3415.32 C71.1@4350,3415.32 4386,3415.32 4393.87,3407.44 C69.1@4430,3407.44 C70.1@4490,3407.44 ; v1(4330,3587.76) U20.33@4330,3591 ; v1(4330,3635) v1(4330,3682.24) ; v1(4377.24,3587.76) v1(4377.24,3635) 4377.24,3644.84 v1(4377.24,3682.24) ; 4455,2984 4455,2935.32 4470,2920.32 ; C9.1@4652.24,1572.36 C8.1@4712.24,1572.36 4754.24,1572.36 4759.68,1566.93 C1.1@4801.93,1566.93 ; v1(4775,1300) v1(4775,1347.24) 4775,1394.49 U2.33@4775.51,1395 ; C17.1@4800,2920.32 4800,2843.44 4802.44,2841 4802.44,2784 ; C15.1@4802.44,2754.12 C15.1@4802.44,2765 ; C13.1@4849.68,2530 C14.1@4849.68,2610 4849.68,2646 4857.56,2653.87 C16.1@4857.56,2690 C16.1@4857.56,2699 ; v1(4869.49,1347.24) 4869.49,1394.49 4870,1393.98 v1(4870,1355) ; U14.12@5245,2715 U14.12@5245,2735.04 ; R16.1@5585,3375.47 5610,3375.47 5619.84,3385.32 C33.1@5645,3385.32 5681,3385.32 5688.87,3377.44 C32.1@5725,3377.44 C31.1@5785,3377.44 ; v1(5597.76,3577.76) v1(5597.76,3625) ; v1(5645,3577.76) U9.33@5645,3581 ; v1(5692.24,3577.76) v1(5692.24,3625) 5692.24,3634.84 v1(5692.24,3672.24) ; U16.29@6323.78,2610 v2(6341.02,2592.76) 6341.02,2616.38 v2(6341.02,2640) ; U16.29@6523.11,2616.38 U16.29@6530,2616.38 ; U16.29@6523.11,2646.89 U16.29@6530,2640 ; U16.19@6523.11,2728.58 U16.18@6548.7,2728.58 U16.17@6574.29,2728.58 U16.16@6599.88,2728.58 U16.15@6625.47,2728.58 ; C56.1@6524.13,2116.69 C56.1@6531,2116.69 ; v2(6530,2592.76) U16.29@6530,2616.38 ; v2(6535,2640) U16.29@6530,2640 ; v2(6577.24,2592.76) v2(6577.24,2640) ; R48.1@7005,3360.94 7034,3360.94 7034.63,3360.32 C60.1@7065,3360.32 7103,3360.32 7110.87,3352.44 C68.1@7150,3352.44 C67.1@7210,3352.44 ; v1(7017.76,3552.76) v1(7017.76,3600) ; v1(7065,3552.76) U18.33@7065,3556 ; v1(7112.24,3552.76) v1(7112.24,3600) 7112.24,3609.84 v1(7112.24,3647.24) ; R13.1@7480,3682.44 7480,3656.84 7489.84,3647 C22.1@7489.84,3622.44 7489.84,3585.87 7481.97,3578 C29.1@7481.97,3542.44 C30.1@7481.97,3482.44 ; v1(7662.28,3689.68) v1(7662.28,3642.44) 7662.28,3595.2 7665,3597.91 v1(7665,3600) ; v1(7709.53,3642.44) v1(7709.53,3689.68) ; v1(7756.77,3595.2) v1(7756.77,3642.44) v1(7756.77,3689.68) ; P22.10@8260,1940 P22.10@8280,1960 ; U16.29@6530,2616.38 U16.29@6530,2640
  Top Layer w12: v1@7094.53,3450.47 U18.30@7094.53,3502.56
  Top Layer w15: 6170,2345 6292.8,2467.8 ; 6284.53,2110.47 R47.1@6340,2110.47 ; U16.1@6292.8,2504.17 6292.8,2562.8 ; 6294.69,2879.69 C50.2@6320,2879.69 C51.2@6380,2879.69 ; R47.1@6346.22,2116.69 C54.1@6404.13,2116.69 C55.1@6464.13,2116.69 C56.1@6524.13,2116.69 ; C56.1@6531,2116.69 C59.1@6579.13,2116.69 ; U16.29@6574.29,2642.95 U16.17@6574.29,2728.58 ; U16.16@6599.88,2728.58 v1@6599.88,2799.88
  Top Layer w20: 3211.89,2407.78 3310,2309.67 ; 3312.76,2306.92 3312.76,1890 4070,1132.76 4070,865 3925,720 P28.10@3680,720 ; 3401.38,1801.38 3675,2075 v1@3675,2252.24 ; 4438,762 4438,1221.4 ; P15.10@5040,720 5270,720 5370,820 5370,1335 5125,1580 5125,2710 5150.04,2735.04 U14.12@5245,2735.04 ; 6170,2345 6170,2225 6284.53,2110.47 ; R42.2@6212.26,2602.74 6180,2635 6180,2705 6280,2805 6280,2865 6294.69,2879.69 ; R42.2@6219.53,2610 U16.29@6323.78,2610 ; 6292.8,2562.8 U16.29@6322.76,2592.76 ; 6524.06,3360.94 R48.1@7005,3360.94 ; 6539.69,3125 C49.2@6539.69,2960 C48.2@6539.69,2900 6585,2900 v1(6605,2880)
  Top Layer w30: P23.10@720,1600 P23.9@720,1700 P23.8@720,1800 P23.7@720,1900 P23.6@720,2000 P14.10@720,2740 P14.9@720,2840 P14.8@720,2940 P14.7@720,3040 P14.6@720,3140 P20.10@720,3780 P20.9@720,3880 P20.8@720,3980 P20.7@720,4080 P20.6@720,4180 ; J2.9@1303.7,780 J2.8@1303.7,665.83 1389.53,580 1880,580 P25.6@2020,720 ; J3.2@6520,3820 6520,3935 P29.10@6905,4320 ; P29.6@7305,4320 7635,4320 7750,4435 8160,4435 8280,4315 P21.10@8280,4080 P21.9@8280,3980 P21.8@8280,3880 P21.7@8280,3780 P21.6@8280,3680 P26.10@8280,3000 P26.9@8280,2900 P26.8@8280,2800 P26.7@8280,2700 P26.6@8280,2600 P22.10@8280,1960 ; P22.6@8280,1535 P22.7@8280,1635 P22.8@8280,1735 P22.9@8280,1835 P22.10@8280,1935
  Top Layer w60: 6520,3039.69 6520,3365 J3.2@6520,3820
  Bottom Layer w8: P14.10@720,2740 790,2810 1180,2810 1359.5,2630.5 1414.5,2630.5 v1(1415,2630) 1511.72,2630 1529.5,2647.78 1529.5,2672.22 1529,2672.72 1529,2820 v1(1592,2883) ; P20.9@720,3880 790,3810 v1(1095,3810) ; 6520,3768 J3.2@6520,3820 ; v1@6600,2875 v1(6605,2880) ; v1@7095,3440 v1(7100,3445)
  Bottom Layer w10: v1@2225.16,1387.24 v1(2187.76,1387.24) v1(2235,1387.24) v1(2282.24,1387.24)
  Bottom Layer w20: 720,1330 720,1076.3 J2.6@1016.3,780 ; P24.10@1560,4320 P24.9@1660,4320 P24.8@1760,4320 P24.7@1860,4320 P24.6@1960,4320 ; P16.10@2900,4320 P16.9@3000,4320 P16.8@3100,4320 P16.7@3200,4320 P16.6@3300,4320 ; v1(3675,2255) 3835,2255 v1(3945,2365) ; P27.10@4120,4320 P27.9@4220,4320 P27.8@4320,4320 P27.7@4420,4320 P27.6@4520,4320 ; v1(6600,2800) v1@6600,2875 ; v1(7095,3320) v1@7095,3440
  Bottom Layer w30: P23.10@720,1600 720,1330 850,1200 v1(1190,1200) ; P20.6@720,4180 720,4255 885,4420 1110,4420 1210,4320 P24.10@1560,4320 ; J2.7@1016.3,665.83 J2.6@1016.3,780 J2.9@1303.7,780 ; P24.6@1960,4320 P16.10@2900,4320 ; P25.6@2020,720 P25.7@2120,720 P25.8@2220,720 P25.9@2320,720 P25.10@2420,720 P28.6@3280,720 P28.7@3380,720 P28.8@3480,720 P28.9@3580,720 P28.10@3680,720 P15.6@4640,720 P15.7@4740,720 P15.8@4840,720 P15.9@4940,720 P15.10@5040,720 5275,720 5315,760 6100,760 P17.6@6140,720 P17.7@6240,720 P17.8@6340,720 P17.9@6440,720 P17.10@6540,720 P19.6@7220,720 P19.7@7320,720 P19.8@7420,720 P19.9@7520,720 P19.10@7620,720 ; P16.6@3300,4320 P27.10@4120,4320 ; P27.6@4520,4320 P18.10@5435,4320 P18.9@5535,4320 P18.8@5635,4320 P18.7@5735,4320 5935,4320 5975,4360 6865,4360 P29.10@6905,4320 P29.9@7005,4320 P29.8@7105,4320 P29.7@7205,4320 P29.6@7305,4320
  other v1: 4822.24,1300 4869.49,1300 2187.76,1387.24 2282.24,1387.24 4825,1395 1450,1815 1355.51,1862.24 1355.51,1909.49 1402.76,1909.49 1365,2772.76 1317.76,2867.24 1400,3512.76 1447.24,3512.76 1447.24,3560 2120,3592.76 1400,3607.24 1447.24,3607.24 3100,3640 7017.76,3647.24 7065,3647.24 3100,3647.76 5597.76,3672.24 5645,3672.24 4282.76,3682.24 2167.24,3687.24 3052.76,3742.24 3100,3742.24
  other v2: 6485,2590 6388.27,2592.76 6430,2595 6388.27,2640 6435.51,2640 6482.76,2640
INHIBIT: U5.90 U14.15 | length 2775.2
  Top Layer w8: v1(3920,2453) 4007.37,2453 4035,2480.63 U5.90@4081.77,2480.63 ; U14.15@5345,2364.96 5345,2500 v1(5369.91,2524.91)
  Bottom Layer w8: v1(3920,2453) 3920,2528 3963,2571 4083.91,2571 4133,2521.91 4182.91,2521.91 4315,2654 4315,2886 4338.5,2909.5 4368,2909.5 4381,2896.5 4381,2818 4403,2796 5494,2796 5520,2770 5520,2656 5394,2530 5375,2530 v1(5369.91,2524.91)